# Altium PCB STM32F103RCT6最小系统.PcbDoc
Units mil, origin at the board's own origin, x right, y up, seen from the top; angles counter-clockwise.
Board outline 3346.46 x 2755.91 mil, 2 copper layers (Top Layer, Bottom Layer); 71 components, 79 nets, 324 pads, 173 vias.
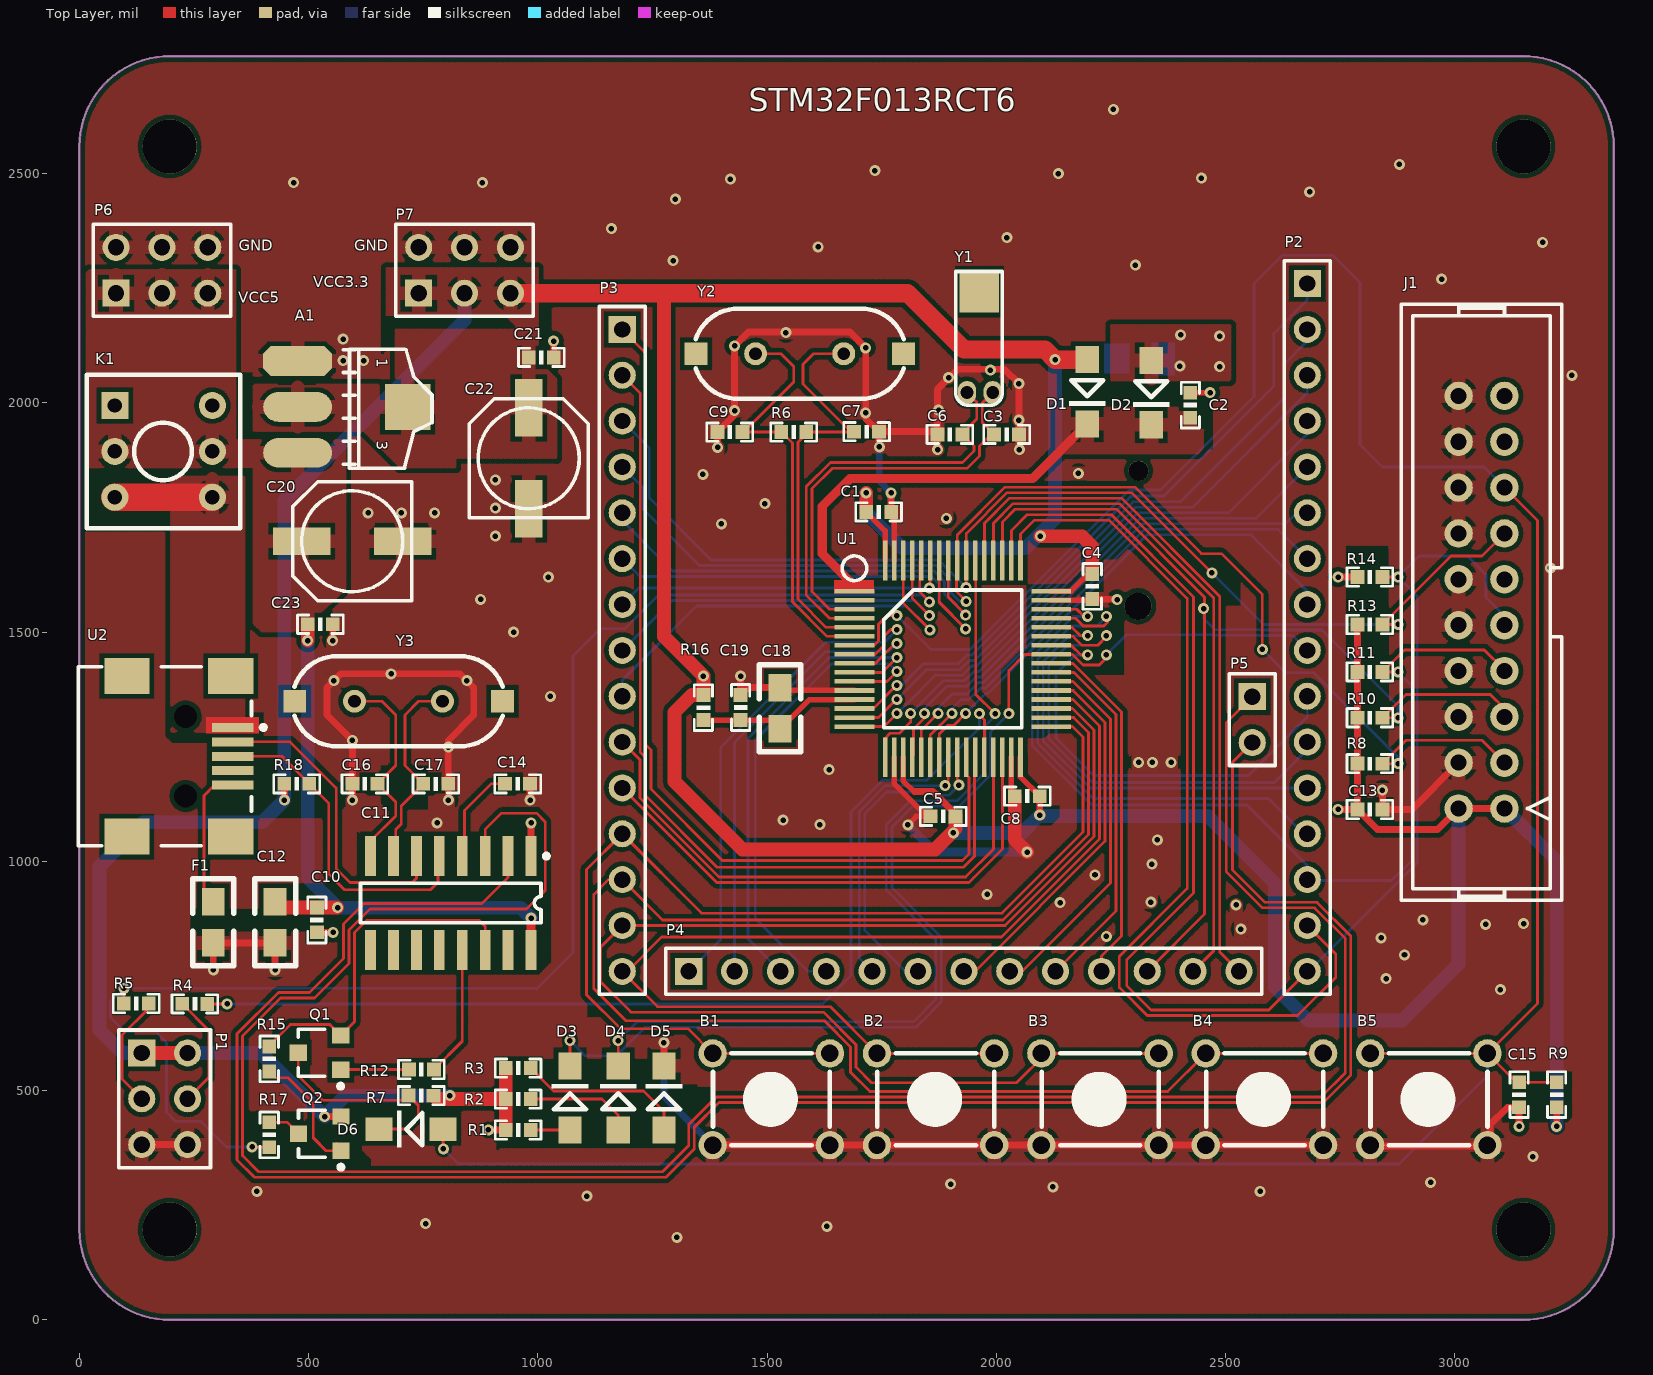
[diagram p0: Top Layer view]
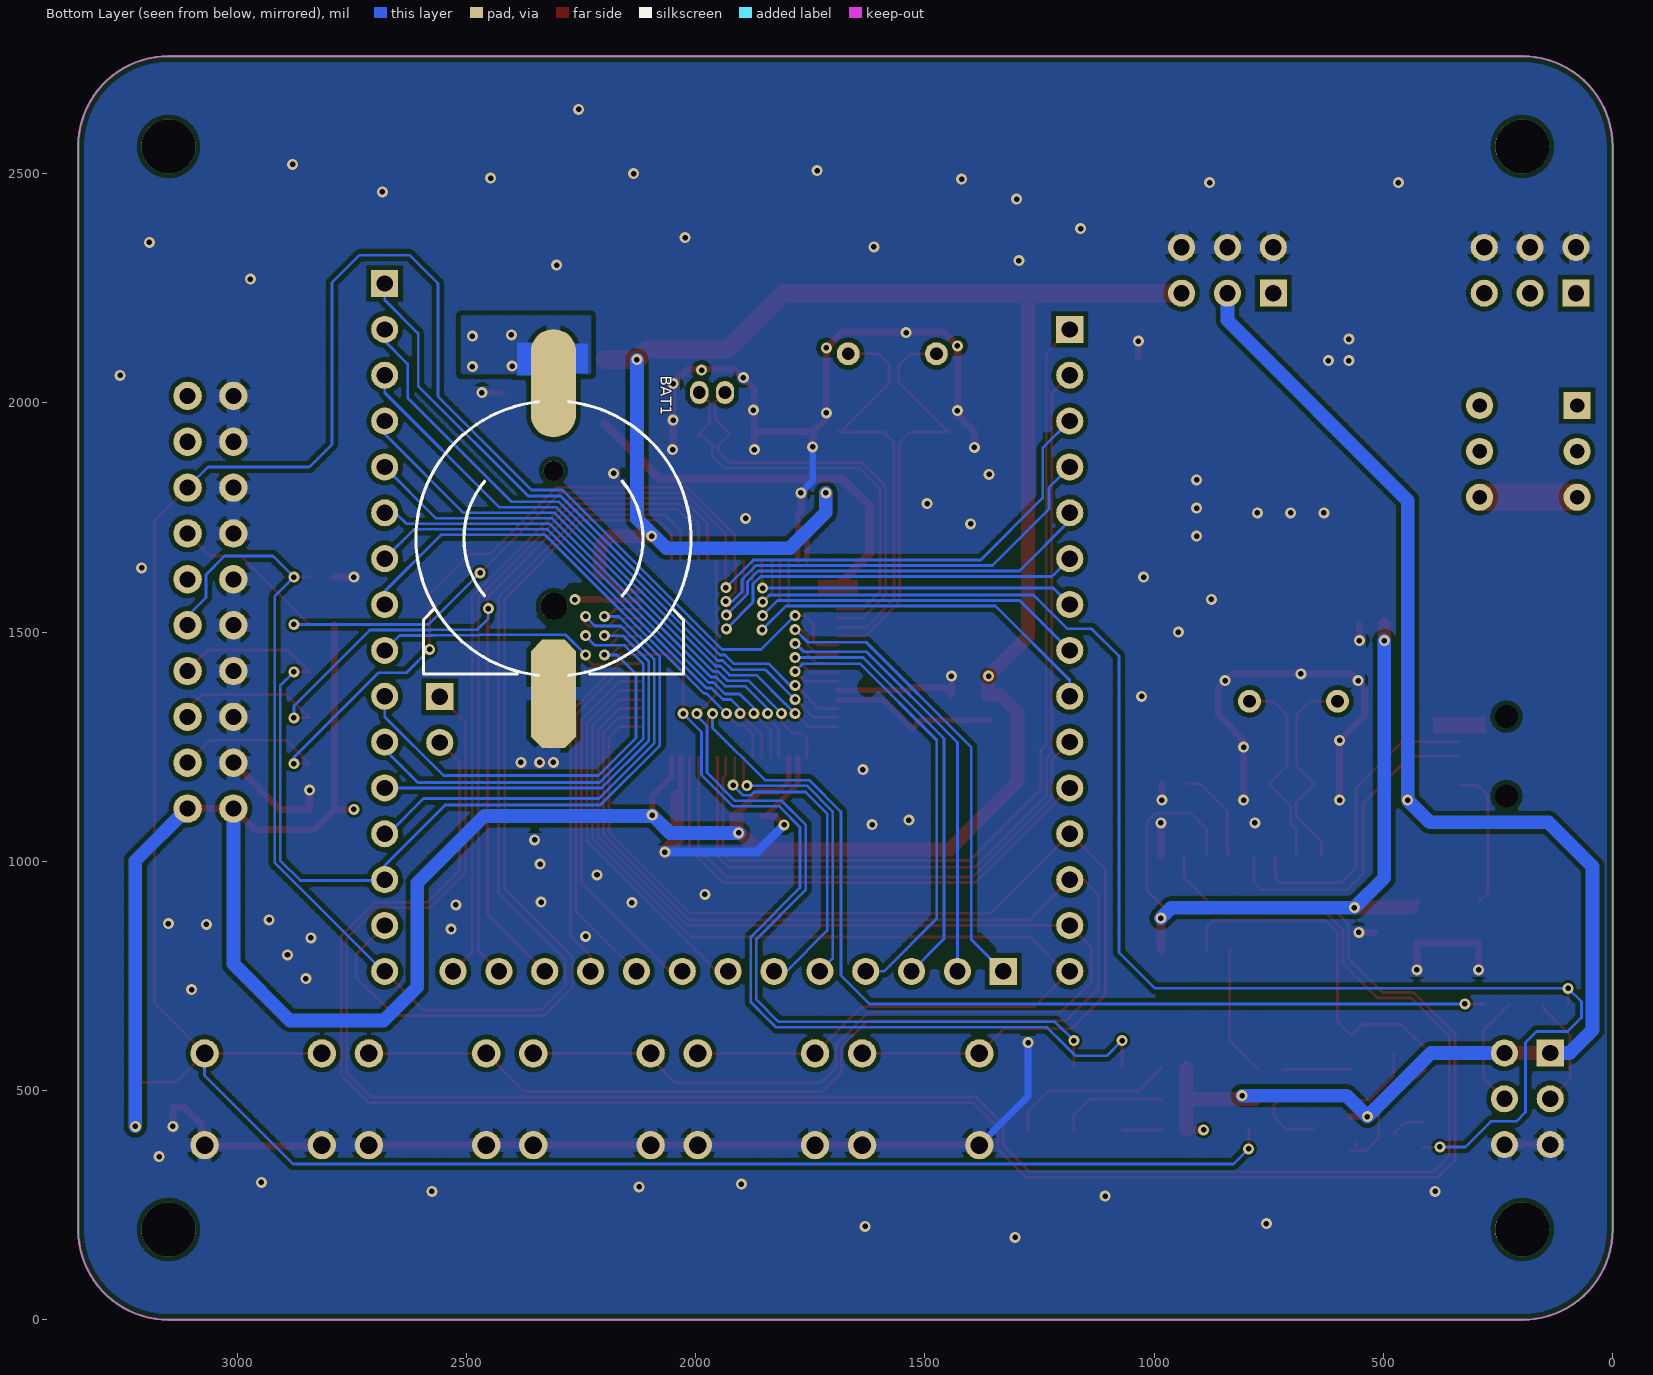
[diagram p1: Bottom Layer view, seen from below]

## Layer stack, top to bottom
Top Layer: signal copper 1.4
Dielectric: dielectric 12.6, FR-4, Dk 4.8
Bottom Layer: signal copper 1.4

## Board outline
196.85,0 cw(c196.85,196.85) 0,196.85 0,2559.06 cw(c196.85,2559.05) 196.85,2755.91 3149.61,2755.91 cw(c3149.61,2559.05) 3346.46,2559.06 3346.46,196.85 cw(c3149.61,196.85) 3149.61,0

## Design rules (kind name [scope] priority, off if disabled: settings)
Clearance via [isvia vs inpolygon] p1: gap=6
Clearance polygon [InPolygon] p2: gap=10
Clearance All [All] p3: gap=6
PolygonConnect [All] p1: connectstyle=Relief reliefconductorwidth=30 reliefentries=4 polygonreliefangle="90 Angle" airgapwidth=10
RoutingVias [All] p1: holewidth=12 width=24 viastyle="Through Hole" minholewidth=12 minwidth=24 maxholewidth=12 maxwidth=24
SilkToSilkClearance [All] p1: silktosilkclearance=2
SilkToSolderMaskClearance [IsPad] p1: minsilkscreentomaskgap=2 clearancetoexposedcopper=TRUE
SolderMaskExpansion [All] p1: expansion=2.5
Width PWR [InNetClass('PWR')] p1: maxlimit=60 minlimit=8 preferedwidth=15
Width [All] p2: maxlimit=6 minlimit=6 preferedwidth=6
26 further rules are at their usual default settings.

## Classes and differential pairs
net class PWR: GND NetK1_3 VBAT VCC3.3 VCC5

## Components (designator, comment, footprint, x,y, rotation, side; value= is the part's Value field where it differs from the comment)
A1 "ASM1117" AMS1117 476.06,2091.09 r270 top locked
B1 "Button" KEY_M 1636.91,381.06 r180 top locked
B2 "Button" KEY_M 1995.41,381.06 r180 top locked
B3 "Button" KEY_M 2353.91,381.06 r180 top locked
B4 "Button" KEY_M 2712.41,381.06 r180 top locked
B5 "Button" KEY_M 3070.91,381.06 r180 top locked
BAT1 "BATT" BATM 2310,1704.06 r180 bottom locked
C1 "104" 0603P 1743,1762.06 r0 top locked
C2 "104" 0603P 2423,1995.06 r270 top locked
C3 "22pF" 0603P 2022.5,1930.99 r180 top locked
C4 "104" 0603P 2209.06,1599.5 r270 top locked
C5 "104" 0603P 1884,1098 r180 top locked
C6 "22pF" 0603P 1898.5,1931.12 r0 top locked
C7 "22pF" 0603P 1717,1937.05 r180 top locked
C8 "104" 0603P 2067.5,1141.99 r180 top locked
C9 "22pF" 0603P 1418.5,1936.12 r0 top locked
C10 "104" 0603P 518,872.06 r90 top locked
C11 "CH340G" SOP16M 810,909.06 r180 top locked
C12 "10uF" 0805 426.94,822.05 r90 top locked
C13 "104" 0603P 2814.5,1113.06 r0 top locked
C14 "104" 0603P 956,1168.99 r180 top locked
C15 "104" 0603P 3140,491.06 r270 top locked
C16 "22" 0603P 622.5,1169.06 r0 top locked
C17 "22" 0603P 777.5,1168.99 r180 top locked
C18 "10uF" 0805 1528.06,1379.06 r270 top locked
C19 "104" 0603P 1442.06,1335.56 r270 top locked
C20 "Cap2" CC6.56.5 595,1698.06 r0 top locked
C21 "104" 0603P 1007.5,2098.99 r180 top locked
C22 "Cap2" CC6.56.5 980,1879.06 r270 top locked
C23 "104" 0603P 525.5,1516.99 r180 top locked
D1 "1N4148" DIODE_SOP 2198,2094.06 r270 top locked
D2 "1N4148" DIODE_SOP 2338,2092.06 r270 top locked
D3 "DS1" DIODE_SOP 1070,414.06 r90 top locked
D4 "DS0" DIODE_SOP 1175,414.06 r90 top locked
D5 "PWR" DIODE_SOP 1275,414.06 r90 top locked
D6 "1N4148" DIODE_SOP 793,416.06 r180 top locked
F1 "500mA" 0805 291.94,822.05 r90 top locked
J1 "JLINK" JTAG_20 3058,1565.06 r90 top locked
K1 "BUTTON" BTN8.5*8.5 77.4,1994.06 r0 top locked
P1 "BOOT" HDR2X3 136,582.06 r270 top locked
P2 "PA" HDR1X16 2678,2260.06 r270 top locked
P3 "PB" HDR1X15 1184,2160.06 r270 top locked
P4 "PC" HDR1X13 1329,760.06 r0 top locked
P5 "Uart1" HDR1X2 2558,1359.06 r270 top locked
P6 "VCC5" HDR2X3 80,2239.06 r0 top locked
P7 "VCC3.3" HDR2X3 740,2239.06 r0 top locked
Q1 "2N3904" SOT-23R 528.74,582.65 r90 top locked
Q2 "2N3906" SOT-23R 529.26,406.06 r90 top locked
R1 "Res2" 0603P 957,414.06 r0 top locked
R2 "Res2" 0603P 957,481.56 r0 top locked
R3 "Res2" 0603P 957,549.06 r0 top locked
R4 "Res2" 0603P 252,689.05 r180 top locked
R5 "Res2" 0603P 124,690.06 r0 top locked
R6 "Res2" 0603P 1558,1936.12 r0 top locked
R7 "Res2" 0603P 745.5,488.99 r180 top locked
R8 "Res2" 0603P 2814.5,1213.07 r0 top locked
R9 "Res2" 0603P 3222,491.06 r270 top locked
R10 "Res2" 0603P 2814.5,1313.09 r0 top locked
R11 "Res2" 0603P 2814.5,1413.1 r0 top locked
R12 "Res2" 0603P 746,546.06 r0 top locked
R13 "Res2" 0603P 2814.5,1516.58 r0 top locked
R14 "Res2" 0603P 2814.5,1620.05 r0 top locked
R15 "Res2" 0603P 414.13,569.06 r270 top locked
R16 "Res2" 0603P 1361,1335.05 r90 top locked
R17 "Res2" 0603P 413.94,403.55 r90 top locked
R18 "Res2" 0603P 474,1169.06 r0 top locked
U1 "STM32F103RCT6" LQFP64 1690.28,1589.13 r0 top locked
U2 "USB" USB/SM0.8-6H5 25,1229.06 r180 top locked
Y1 "32.768k" XTAL32 1936,2022.49 r90 top locked
Y2 "8M" XTAL_US 1474.87,2107.05 r0 top locked
Y3 "12M" XTAL_US 792.13,1349.06 r180 top locked

## Footprints (in the part's own frame and the unit in brackets; to place one, negate y for a bottom-side part, rotate by r counter-clockwise, add the part's x,y. Pads: shape width x height; smd on the part's side, far side on the other; paste and mask are expansions set on the pad)
0603P [mil]
  rect 30x30 smd: 1(-27,0) 2(27.5,-0.06)
  silkscreen extent -50,-20 50,20
0805 [mil]
  rect 60x50 smd: 1(0,-0.06) 2(90,-0.06)
  silkscreen extent -50,-45 140,45
AMS1117 [mil]
  oct 65x150 smd: 1(0.03,-0.06)
  oval 65x150 smd: 2(100.03,-0.06) 3(200.03,-0.06)
  rect 100x100 smd: 4(100.03,239.94)
  silkscreen extent -26,100 234,293
BATM [mm]
  round 1.1 hole 1.1 unplated: 0(0,3.748)
  round 1.5 hole 1.5 unplated: 0(0.025,-3.752)
  oct 2.5x6 smd: 1(0,-8.602)
  oval 2.5x6 smd: 2(0,8.598)
  silkscreen extent -7.62,-7.58 7.62,7.57
BTN8.5*8.5 [mm]
  rect 1.5x1.5 hole 0.8: 1(0,0)
  round 1.5 hole 0.8: 2(0,-2.54) 3(0,-5.08) 4(5.4,-5.08) 5(5.4,-2.54) 6(5.4,0)
  silkscreen extent -1.55,-6.79 6.95,1.71
CC6.56.5 [mm]
  rect 3.2x1.5 smd: 1(-2.794,0) 2(2.8,0)
  silkscreen extent -3.3,-3.3 3.3,3.3
DIODE_SOP [mm]
  rect 1.5x1.3 smd: 1(0,0) 2(3.556,0)
  silkscreen extent 1.14,-1.02 2.56,1.02
HDR1X2 [mm] "Connector; Header; 2 Position"
  rect 1.5x1.5 hole 0.9: 1(0,0)
  round 1.5 hole 0.9: 2(2.54,0)
  silkscreen extent -1.27,-1.27 3.81,1.27
HDR1X13 [mm] "Connector; Header; 13 Position"
  rect 1.5x1.5 hole 0.9: 1(0,0)
  round 1.5 hole 0.9: 2(2.54,0) 3(5.08,0) 4(7.62,0) 5(10.16,0) 6(12.7,0) 7(15.24,0) 8(17.78,0) 9(20.32,0) 10(22.86,0) 11(25.4,0) 12(27.94,0) 13(30.48,0)
  silkscreen extent -1.27,-1.27 31.75,1.27
HDR1X15 [mm] "Connector; Header; 15 Position"
  rect 1.5x1.5 hole 0.9: 1(0,0)
  round 1.5 hole 0.9: 2(2.54,0) 3(5.08,0) 4(7.62,0) 5(10.16,0) 6(12.7,0) 7(15.24,0) 8(17.78,0) 9(20.32,0) 10(22.86,0) 11(25.4,0) 12(27.94,0) 13(30.48,0) 14(33.02,0) 15(35.56,0)
  silkscreen extent -1.27,-1.27 36.83,1.27
HDR1X16 [mm] "Connector; Header; 16 Position"
  rect 1.5x1.5 hole 0.9: 1(0,0)
  round 1.5 hole 0.9: 2(2.54,0) 3(5.08,0) 4(7.62,0) 5(10.16,0) 6(12.7,0) 7(15.24,0) 8(17.78,0) 9(20.32,0) 10(22.86,0) 11(25.4,0) 12(27.94,0) 13(30.48,0) 14(33.02,0) 15(35.56,0) 16(38.1,0)
  silkscreen extent -1.27,-1.27 39.37,1.27
HDR2X3 [mm] "Connector; Header; 3x2 Position"
  rect 1.5x1.5 hole 0.9: 1(0,0)
  round 1.5 hole 0.9: 2(0,2.54) 3(2.54,0) 4(2.54,2.54) 5(5.08,0) 6(5.08,2.54)
  silkscreen extent -1.27,-1.27 6.35,3.81
JTAG_20 [mil]
  round 62 hole 35: 1(-450,-50) 2(-450,50) 3(-350,-50) 4(-350,50) 5(-250,-50) 6(-250,50) 7(-150,-50) 8(-150,50) 9(-50,-50) 10(-50,50) 11(50,-50) 12(50,50) 13(150,-50) 14(150,50) 15(250,-50) 16(250,50) 17(350,-50) 18(350,50) 19(450,-50) 20(450,50)
  silkscreen extent -650,-175 650,175
KEY_M [mil]
  round 62 hole 38: 1(0,0) 1(255.91,0) 2(0,-200) 2(255.91,-200)
  silkscreen extent 0,-200 255,0
LQFP64 [mm]
  rect 2.2x0.254 smd: 1(0,0) 2(0,-0.5) 3(0,-1) 4(0,-1.5) 5(0,-2) 6(0,-2.5) 7(0,-3) 8(0,-3.5) 9(0,-4) 10(0,-4.5) 11(0,-5) 12(0,-5.5) 13(0,-6) 14(0,-6.5) 15(0,-7) 16(0,-7.5) 33(10.9,-7.5) 34(10.9,-7) 35(10.9,-6.5) 36(10.9,-6) 37(10.9,-5.5) 38(10.9,-5) 39(10.9,-4.5) 40(10.9,-4) 41(10.9,-3.5) 42(10.9,-3) 43(10.9,-2.5) 44(10.9,-2) 45(10.9,-1.5) 46(10.9,-1) 47(10.9,-0.5) 48(10.9,0)
  rect 0.254x2.2 smd: 17(1.7,-9.2) 18(2.2,-9.2) 19(2.7,-9.2) 20(3.2,-9.2) 21(3.7,-9.2) 22(4.2,-9.2) 23(4.7,-9.2) 24(5.2,-9.2) 25(5.7,-9.2) 26(6.2,-9.2) 27(6.7,-9.2) 28(7.2,-9.2) 29(7.7,-9.2) 30(8.2,-9.2) 31(8.7,-9.2) 32(9.2,-9.2) 49(9.2,1.7) 50(8.7,1.7) 51(8.2,1.7) 52(7.7,1.7) 53(7.2,1.7) 54(6.7,1.7) 55(6.2,1.7) 56(5.7,1.7) 57(5.2,1.7) 58(4.7,1.7) 59(4.2,1.7) 60(3.7,1.7) 61(3.2,1.7) 62(2.7,1.7) 63(2.2,1.7) 64(1.7,1.7)
  silkscreen extent -0.68,-7.56 9.26,1.95
SOP16M [mm]
  rect 0.6x2.2 smd: 1(-4.445,-2.6) 2(-3.175,-2.6) 3(-1.905,-2.6) 4(-0.635,-2.6) 5(0.635,-2.6) 6(1.905,-2.6) 7(3.175,-2.6) 8(4.445,-2.6) 9(4.445,2.6) 10(3.175,2.6) 11(1.905,2.6) 12(0.635,2.6) 13(-0.635,2.6) 14(-1.905,2.6) 15(-3.175,2.6) 16(-4.445,2.6)
  silkscreen extent -5.42,-2.72 5,1.1
SOT-23R [mm]
  rect 0.9x0.95 smd: 1(0.95,-1.048) 2(-0.95,-1.048) 3(0,1.302)
  silkscreen extent -1.98,-1.17 1.3,1.3
USB/SM0.8-6H5 [mm]
  rect 2.3x0.5 smd: 1(-7.85,-1.6) 2(-7.85,-0.8) 3(-7.85,0) 4(-7.85,0.8) 5(-7.85,1.6)
  rect 2.5x2 smd: 6(-7.75,4.45) 7(-1.996,4.45) 8(-7.75,-4.45) 9(-1.996,-4.45)
  round 0.6 hole 1.27 unplated: MH1(-5.25,2.2) MH2(-5.25,-2.2)
  silkscreen extent -9.68,-4.95 0.7,4.95
XTAL32 [mil]
  oval 50x40 hole 28: 1(0,0) 2(0,-56)
  rect 92.13x86 smd: ""(220,-27)
  silkscreen extent -28,-77 264,25
XTAL_US [mil]
  round 50 hole 28: 1(0,0) 2(192.13,0)
  rect 50x50 smd: ""(-130.32,0) ""(322.44,0)
  silkscreen extent -131,-98 323,98

## Part data
A1: library part AMS117
BAT1: library part BAT
C1 C2 C3 C4 C5 C6 C7 C8 C9 C10 C12 C13 C14 C15 C16 C17 C18 C19 C21 C23: library part Cap, "Capacitor"
C20 C22: "Capacitor"
D1 D2 D6: library part LED
D3 D4 D5: library part LED3, "Typical BLUE SiC LED"
F1: library part Res2, "Resistor"
J1: library part JLINK2X10
P1 P6 P7: library part "Header 3X2", "Header, 3-Pin, Dual row"
P2: library part "Header 16", "Header, 16-Pin"
P3: library part "Header 15", "Header, 15-Pin"
P4: library part "Header 13", "Header, 13-Pin"
P5: library part "Header 2", "Header, 2-Pin"
Q1: "NPN General Purpose Amplifier"
Q2: "PNP General Purpose Amplifier"
R1 R2 R3 R4 R5 R6 R7 R8 R9 R10 R11 R12 R13 R14 R15 R16 R17 R18: "Resistor"
U1: library part STM32F103RCT6_64Pin
Y1 Y2 Y3: library part XTAL, "Crystal Oscillator"

## Free pads (board coordinates)
  round 118.11 hole 118.11 unplated: 1(196.85,196.85) 1(196.85,2559.06) 1(3149.61,196.85) 1(3149.61,2559.06)

## Via types
v1: diameter 24, hole 12, Top Layer to Bottom Layer, tented both sides, 173 vias

## Nets (pads, with @x,y where several pads share a name; then routed paths per layer and width w, separated by ;. In a path a pad name is that pad's centre, name@x,y a point inside that pad or via, vN(x,y) a via of type N, cw(c..) or ccw(c..) an arc to the next point about the centre after c; other vN are vias at no path point)
BOOT0: R5.1 R17.1 U1.60 | length 3258
  Top Layer w6: R5.1 v1(97,723) ; v1(377,377.06) 377.5,376.56 R17.1 ; U1.60 1833,1653.11 1833,1587.3 1854,1566.3 v1(1854,1566)
  Bottom Layer w6: v1(377,377.06) 320.94,377.06 265,433 210,433 190,453 190,605 166,629 98,629 68,659 68,694 v1(97,723) 998,723 1076.5,801.5 1076.5,1447.5 1136,1507 1189,1507 1263,1581 1815.94,1581 1816,1581.06 1838.94,1581.06 v1(1854,1566)
BOOT1: R4.1 U1.28 | length 2273
  Top Layer w6: R4.1 321.94,689.06 v1(322,689) ; v1(1963,1322) 1963,1319 1973.74,1308.26 U1.28
  Bottom Layer w6: v1(322,689) 1621,689 1683,751 1683,1107.94 1752.06,1177 1849,1177 1963,1291 v1(1963,1322)
CH340_D+: C11.5 R18.2 U2.3 | length 724.3
  Top Layer w6: U2.3 441.43,1229.06 R18.2 544,1126.49 544,972 578,938 765.94,938 782,954.06 782,1008.42 C11.5
CH340_D-: C11.6 U2.2 | length 683.2
  Top Layer w6: U2.2 459.5,1260.55 560,1160.06 560,984 590,954 726,954 735,963 C11.6
GND: A1.1 B1.1 B2.1 B3.1 B4.1 B5.1 BAT1.1 C1.2 C2.1 C3.1 C4.2 C5.2 C6.1 C7.1 C8.2 C9.1 C10.1 C11.1 C12.1 C13.2 C14.1 C15.2 C16.1 C17.1 C18.1 C19.1 C20.2 C21.1 C22.2 C23.1 D5.2 F1.1 J1.4 J1.6 J1.8 J1.10 J1.12 J1.14 J1.16 J1.18 J1.20 P1.5 P1.6 P6.2 P6.4 P6.6 P7.2 P7.4 P7.6 R14.1 U1.12 U1.18 U1.31 U1.47 U1.63 | length 6681.3
  Top Layer w12: C18.1 1534.46,1372.59 U1.12 ; C1.2 1776.89,1755.6 U1.63 ; U1.18 1776.89,1169.76 C5.2@1848.59,1098.06 ; v1(1807,1079.69) 1825.37,1098.06 C5.2@1848.59,1098.06 ; C5.2 C5.2@1848.59,1098.06 ; U1.31 2032.8,1149.26 C8.2 ; U1.47 C4.2@2197.82,1569.44 ; C2.1 v1(2466,2022.06)
  Top Layer w15: P1.5 P1.6 ; v1(292,763.06) F1.1 C12.1 v1(427,763.06) ; C10.1 v1(553.56,845.06) ; v1(552.5,1481.43) C23.1 ; v1(595.5,1133.56) v1(595.5,1263.56) 540,1319.06 540,1379.06 570,1409.06 830,1409.06 860,1379.06 860,1319.06 804.5,1263.56 C17.1 v1(804.5,1133.43) ; v1(983,1133.43) C14.1 ; C11.1 v1(985,1084.06) ; C21.1 v1(1034.5,2134.56) ; D5.2 v1(1275,604.56) ; B1.1@1381,381.06 1636.91,381.06 B4.1@2727.48,381.06 ; v1(1392,1903) 1391.5,1903.5 C9.1 1429,1973.62 v1(1429,2124.06) 1459,2154.06 1681,2154.06 v1(1715,2120.06) 1715,1966.06 C7.1 ; v1(1442.06,1403.99) C19.1 1458.56,1379.06 C18.1 ; v1(1744.5,1903.94) 1744,1904.44 C7.1 ; C1.2 v1(1770.5,1803.43) ; v1@1871.5,1898.5 C6.1 ; v1(2050,1897.87) 2049.5,1898.37 C3.1 2049,1931.49 v1(2049,2042.06) 2018,2073.06 1915,2073.06 1871.5,2029.56 C6.1 ; C4.2@2209.5,1571.5 v1@2263,1571.5 ; v1(2745,1620.05) R14.1 ; B5.1@2815,379.06 3070.91,379.06 3076.95,385.1 3076.95,426.01 3114.5,463.56 C15.2 v1(3139.94,422.12) ; v1(2842,1155.49) C13.2 2905.94,1112.99 J1.4 ; C7.1 1865.56,1937.06 C6.1
  Top Layer w30: C8.2 2040,1047 v1(2067,1020)
  Bottom Layer w15: v1(1275,604.56) 1275,487.06 B1.1@1381,381.06 ; v1(1744.5,1903.94) 1744.5,1829.43 v1(1770.5,1803.43)
  Bottom Layer w20: v1(1807,1079.69) 1866.69,1020 v1(2067,1020)
  other v1: 1303,180 1630,204.06 755,210 1107,270 387,280 2575,280 2123,290 1900,296.06 2947,300 3170,356.06 3099,720 2850,744.06 2890,796.06 2839,833.2 2240,836.06 2533,852 3067,862.45 3150,864.06 2930,872.06 2523,905 2139,910 2337,911 1980,928.06 2215,970.5 2339,994 2351,1047 1615,1080 780,1084.06 1535,1090 1635,1200 2310,1216.06 2340,1216.06 2380.92,1216.06 804.5,1249.06 1027,1360 555,1394.06 845,1394.06 680,1409.06 947,1500 875,1571.14 2263,1571 1023,1620 3208,1640.06 907,1709.06 1400,1736.06 1891,1748.06 630,1760.06 702.5,1760.06 775,1760.06 907,1770.56 1495,1780 907,1832.06 1360,1844.06 2179,1846 1872,1898 2049,1962.06 1715,1978.06 1429,1983.06 1874,1984.06 1896,2055.06 3255,2060 1987,2071.06 575,2092.06 620,2092.06 575,2139.06 1541,2153.06 2971,2270 2303,2300 1295,2310 1611,2340 3191,2350 2023,2360 1160,2380.06 1300,2444.06 2683,2460 467,2480 879,2480 1420,2488.06 2447,2490 2135,2500 1735,2506.23 2879,2520 2255,2640
JTCK: J1.9 P2.16 R14.2 U1.50 | length 3277.2
  Top Layer w6: U1.50 2032.8,1721.63 2067.16,1756 2250.5,1756 2430,1576.5 2430,931 2284,785 2284,729 2337,676 2593.94,676 P2.16 ; R14.2 v1(2875.94,1619.99)
  Bottom Layer w6: P2.16 2681.06,760.06 2918,997 2918,1577.93 v1(2875.94,1619.99) 2921.94,1666 3027,1666 3068,1625 3068,1575.06 3108,1535.06 J1.9
JTDI: J1.5 P4.11 R10.2 U1.51 | length 2385.7
  Top Layer w6: U1.51 2013.11,1740 2041.11,1768 2262,1768 2454,1576 2454,885.06 P4.11 ; v1(2875.94,1313.02) R10.2 2893.03,1364.06 3077,1364.06 3108,1333.06 J1.5
  Bottom Layer w6: v1(2452,1551) 2452,1530 2477,1505 2577.03,1505 2577.51,1504.51 2710.49,1504.51 2875.94,1339.06 v1(2875.94,1313.02)
JTDO: J1.13 P3.3 R13.2 U1.55 | length 2562
  Top Layer w6: v1(1934,1597) 1934.37,1597.37 U1.55 1934.37,1714.89 2023.48,1804 2295,1804 v1(2470,1629) ; v1(2875.94,1516.51) R13.2 2991.54,1666.06 3059,1666.06 J1.13
  Bottom Layer w6: P3.3 1243,1901.06 1243,1792 1378,1657 1874,1657 v1(1934,1597) ; v1(2470,1629) 2582.49,1516.51 v1(2875.94,1516.51)
JTMS: J1.7 P2.14 R11.2 U1.46 | length 2185.3
  Top Layer w6: U1.46 2175.24,1549.76 2191,1534 v1@2198,1534 ; v1(2875.94,1413.04) R11.2 2890.02,1461.06 3064,1461.06 3108,1417.06 J1.7
  Bottom Layer w6: v1(2199,1534) 2166.73,1534 2078,1445.27 2078,1252.96 2207.96,1123 2546,1123 2678,991 P2.14 2680.06,958 2862,958 2906,1002 2906,1382.97 v1(2875.94,1413.04)
JTRST: J1.3 P3.4 R8.2 U1.56 | length 2743.1
  Top Layer w6: v1(1934,1567) 1934,1567.3 1913,1588.3 1913,1654.37 U1.56 1914.68,1712.17 2018.51,1816 2302,1816 2447,1671 2491,1671 2580,1582 v1(2580,1462) ; v1(2875.94,1213.01) R8.2 2893.05,1264.06 3059,1264.06 J1.3
  Bottom Layer w6: P3.4 1229,1815.06 1229,1768 1352,1645 1868.64,1645 1899,1614.64 1899,1587.97 1919.97,1567 v1(1934,1567) ; v1(2580,1462) 2631,1411 2692,1411 2875.94,1227.06 v1(2875.94,1213.01)
KEY0: B1.2 P3.12 U1.33 | length 2403.4
  Top Layer w6: B1.2@1636.91,581.06 1381,581.06 1327.06,635 1180,635 1106,709 1106,982.06 P3.12 1357.06,887 2012.12,887 2189,1063.88 2189,1271 2166.15,1293.85 U1.33
KEY1: B4.2 P3.13 U1.34 | length 3499
  Top Layer w6: U1.34 2168.49,1313.54 2201,1281.03 2201,1058.91 2014.14,872.06 1272,872.06 P3.13 1154.06,960.06 1122,928 1122,722.06 1191.54,652.51 1624.51,652.51 1682,595.03 1682,540 1724,498 2373.44,498 B4.2@2456.5,581.06 ; B4.2@2471.57,581.06 2712.41,581.06 B4.2@2727.48,581.06
  Bottom Layer w6: P3.13 P3.13@1203.94,960.06
KEY2: B3.2 P3.14 U1.35 | length 2970.4
  Top Layer w6: U1.35 2165.78,1333.22 2213,1286 2213,1053.94 2019.11,860.06 P3.14 1137,813.06 1137,737 1203,671 1623,671 1694,600 1694,551 1728,517 2043.99,517 2108.05,581.06 2353.91,581.06 B3.2@2363.95,581.06
KEY3: B2.2 P3.15 U1.36 | length 2421.8
  Top Layer w6: B2.2@1739.5,581.06 1637.56,683 1261.06,683 P3.15 1195.06,760.06 1270,835 2011.03,835 2225,1048.97 2225,1295 2167.09,1352.91 U1.36 ; B2.2@1744.52,581.06 1995.41,581.06 B2.2@2000.43,581.06
LED0: D3.2 P2.9 U1.41 | length 2575.9
  Top Layer w6: D3.2 v1(1070,609.06) ; v1(2027,1322) 2027,1416.5 2061.83,1451.33 U1.41 2165.92,1451.33 2188.97,1428.28 2224.28,1428.28 v1@2241,1445
  Bottom Layer w6: v1(1070,609.06) 1103,576.06 1171.7,576.06 1196,600.36 1196,600.5 1233.5,638 1823.97,638 1835.97,650 1836.94,650 1879.53,692.58 1879.53,834.97 1772,942.5 1772,1074.39 1816.97,1119.36 1816.97,1120 1918.67,1120 1987,1188.33 1987,1282 v1(2027,1322) ; v1(2240,1450) 2240,1450.85 2283.15,1494 2471.03,1494 2472.03,1493 2572.06,1493 2572.54,1492.51 2645.54,1492.51 P2.9
LED1: D4.2 U1.54 | length 1962.2
  Top Layer w6: D4.2 v1(1175,609.06) ; U1.54 1955,1655.11 1955,1364 v1(1997,1322)
  Bottom Layer w6: v1(1175,609.06) 1215.94,650 1819,650 1867.53,698.53 1867.53,830 1760,937.53 1760,1080 1812,1132 1913.7,1132 1975,1193.3 1975,1295 1997,1317 v1(1997,1322)
NetBAT1_2: BAT1.2 D2.1
  other v1: 2487,2079.06 2400,2080.06 2487,2145.67 2401.57,2148.06
NetC11_4: C11.4 C14.2 | length 214.2
  Top Layer w6: C11.4 840,1016.42 840,1111.06 898,1169.06 C14.2
NetC11_7: C11.7 C17.2 Y3.1 | length 445.7
  Top Layer w6: C11.7 690,1016.42 690,1069.06 702,1081.06 702,1121.06 C17.2 710,1209.06 710,1319.06 740,1349.06 Y3.1
NetC11_8: C11.8 C16.2 Y3.2 | length 466
  Top Layer w6: Y3.2 660,1349.06 690,1319.06 690,1209.06 650,1169.06 690,1129.06 690,1099.06 635,1044.06 C11.8
NetC11_13: C11.13 R12.2 | length 286.2
  Top Layer w6: R12.2 835,607.49 C11.13
NetC11_14: C11.14 Q1.1 R15.1 | length 777.7
  Top Layer w6: R15.1@412,596.06 460,644.06 546,644.06 Q1.1 600,650.06 600,845.03 625.97,871 872,871 885,858 C11.14
NetC18_2: C18.2 C19.2 R16.1 U1.13 | length 363.6
  Top Layer w12: R16.1 C19.2 1509,1308.06 C18.2 1591.85,1352.91 U1.13
NetD3_1: D3.1 R1.2 | length 85.5
  Top Layer w6: R1.2 1069.94,413.99 D3.1
NetD4_1: D4.1 R2.2 | length 237.4
  Top Layer w6: R2.2 1140,481.49 1175,446.49 D4.1
NetD5_1: D5.1 R3.2 | length 369.8
  Top Layer w6: R3.2 1034.44,499.06 1230,499.06 1275,454.06 D5.1
NetD6_2: D6.2 Q1.3 R7.2 | length 469.4
  Top Layer w6: Q1.3 477.48,531.47 529.83,479.12 708.06,479.12 R7.2 739,468.06 739,443.06 712,416.06 D6.2
NetF1_2: F1.2 U2.5 | length 310.9
  Top Layer w6: F1.2 271.91,932.15 271.91,1142.96 295.01,1166.07 U2.5
NetK1_3: K1.3 K1.4 U2.1 | length 212.6
  Top Layer w60: K1.3 K1.4
NetP1_3: P1.3 R5.2 | length 250
  Top Layer w6: P1.3 93,525.06 93,621.06 151.5,679.56 R5.2
NetP1_4: P1.4 R4.2 | length 249.9
  Top Layer w6: R4.2 282,631.62 282,528.06 P1.4
NetQ1_2: Q1.2 R12.1 | length 149.3
  Top Layer w6: Q1.2 570.8,546.06 R12.1
NetQ2_2: Q2.2 R15.2 | length 286.8
  Top Layer w6: R15.2@408.24,545.25 R15.2@411.94,541.56 ; R15.2 427.56,528.06 455,528.06 510,473.06 510,435.76 510,397.06 538.4,368.65 Q2.2 ; Q2.2@560.9,376.15 Q2.2@560.9,385.15
NetQ2_3: Q2.3 R17.2 | length 74.4
  Top Layer w6: R17.2 453,431.06 Q2.3
OSC32_1: C3.2 U1.3 Y1.2 | length 903.6
  Top Layer w6: U1.3 1636.3,1549.76 1598,1588.06 1598,1813.03 1641.97,1857 1935.94,1857 1963,1884.06 1963,1906.06 1988,1931.06 C3.2 1969,1957.05 1969,1999.5 Y1.2
OSC32_2: C6.2 U1.4 Y1.1 | length 920
  Top Layer w6: U1.4 1635.98,1530.07 1585,1581.06 1585,1817 1638,1870 1925.94,1870 1951,1895.06 1951,1906.06 C6.2 1926,1933.06 1957,1964.06 1957,2001.49 Y1.1
OSCIN: C7.2 R6.2 U1.5 Y2.2 | length 920.6
  Top Layer w6: Y2.2 1601,2107.06 1578,2084.06 1578,2041.06 1681.94,1937.12 C7.2 ; C7.2@1689.5,1936.06 R6.2 1585.5,1932.56 1567,1914.06 1567,1572.06 1628.67,1510.39 U1.5
OSCOUT: C9.2 R6.1 U1.6 Y2.1 | length 914.3
  Top Layer w6: C9.2 C9.2@1449,1936.06 ; Y2.1 1530,2107.06 1558,2079.06 1558,2045.06 C9.2@1449,1936.06 ; R6.1@1530.94,1936.06 C9.2@1449,1936.06 ; R6.1 1555,1912.12 1555,1566.06 1630.35,1490.7 U1.6
PA0: P2.1 U1.14 | length 1458.8
  Top Layer w6: U1.14 1731.62,1333.22 v1@1781.55,1383.14 ; v1@1781,1383.14 v1@1781,1384
  Bottom Layer w6: v1(1783,1383.5) 1793.5,1383.5 1841,1431 1917,1431 1936,1450 1946.97,1450 2293.97,1797 2365,1797 2605,2037 2605,2151 2678,2224 P2.1
PA1: P2.2 U1.15 | length 1396.2
  Top Layer w6: U1.15 1742.54,1313.54 1781.57,1352.57 v1@1783,1352.57
  Bottom Layer w6: v1(1783,1353) 1848,1418 1920.97,1418 1940.97,1438 1951.94,1438 2297.94,1784 2401,1784 2628,2011 2628,2085 2678,2135 P2.2
PA2: P2.3 U1.16 | length 1327.2
  Top Layer w6: U1.16 1754.85,1293.85 v1@1783,1322
  Bottom Layer w6: v1(1783,1322.5) 1804,1343.5 1804.5,1343.5 1867,1406 1925.94,1406 1945.94,1426 1956.91,1426 2302.91,1772 2428,1772 2678,2022 P2.3
PA3: P2.4 U1.17 | length 1276.3
  Top Layer w6: U1.17 1757.2,1268.27 1768.16,1279.23 1788.23,1279.23 1813,1304 v1(1813,1322.5) v1@1813,1322.8
  Bottom Layer w6: v1(1813,1322.5) 1884.5,1394 1930.91,1394 1950.91,1414 1961.88,1414 2307.88,1760 2506,1760 2678,1932 P2.4
PA4: P2.5 U1.20 | length 1182.6
  Top Layer w6: U1.20 1819,1229.66 1819,1289 1843,1313 v1(1843,1322.5) ; v1@1842.25,1323.25 v1@1843,1324
  Bottom Layer w6: v1(1843,1322.5) 1843,1333 1892,1382 1935.88,1382 1955.88,1402 1966.85,1402 2312.85,1748 2565.94,1748 P2.5 P2.5@2666.94,1860.06
PA5: P2.6 U1.21 | length 1117.1
  Top Layer w6: U1.21 1835.95,1285.45 1864,1313.5 ; v1(1873,1322.5) 1864,1313.5 ; v1@1873,1323 1864,1314 1864,1313.5
  Bottom Layer w6: v1(1873,1322.5) 1873,1334 1903.65,1364.65 1935.5,1364.65 1960.85,1390 1971.82,1390 2317.82,1736 2630,1736 2654.06,1760.06 P2.6
PA6: P2.7 U1.22 | length 1089.1
  Top Layer w6: U1.22 1855.63,1275.13 v1(1903,1322.5)
  Bottom Layer w6: v1(1903,1322.5) 1903,1333 1922.65,1352.65 1940.47,1352.65 1965.82,1378 1976.79,1378 2322.79,1724 2614.06,1724 P2.7
PA7: P2.8 U1.23 | length 1113.3
  Top Layer w6: U1.23 1875.32,1277.84 1894.24,1296.76 1907.26,1296.76 v1(1933,1322.5)
  Bottom Layer w6: v1(1933,1322.5) 1976.5,1366 1981.76,1366 2327.76,1712 2555,1712 2678,1589 P2.8
PA9: P2.10 U1.42 | length 994.3
  Top Layer w6: U1.42 2163.2,1471.02 2184.22,1450 v1(2199,1450)
  Bottom Layer w6: v1(2199,1450) 2171.28,1450 2130,1408.72 2130,1268.84 2211.92,1186.92 2549.92,1186.92 2678,1315 P2.10
PA10: P2.11 U1.43 | length 1101.2
  Top Layer w6: U1.43 2167.3,1490.7 2187,1471 2221,1471 2240,1490 v1@2240,1491
  Bottom Layer w6: v1(2240,1492) 2219,1471 2154.65,1471 2114,1430.35 2114,1267.87 2209.81,1172.06 2606,1172.06 2678,1244.06 P2.11
PA11: P2.12 U1.44 | length 997.7
  Top Layer w6: U1.44 2165.17,1510.39 2183.56,1492 v1@2198,1492
  Bottom Layer w6: v1(2199,1492) 2158.68,1492 2102,1435.32 2102,1262.9 2204.84,1160.06 P2.12
PA12: P2.13 U1.45 | length 1186.1
  Top Layer w6: U1.45 2172.23,1530.07 2189.3,1513 2234,1513 2242,1521 v1@2242,1533
  Bottom Layer w6: v1(2240,1534) 2219,1513 2162.7,1513 2090,1440.29 2090,1257.93 2210.93,1137 2593,1137 2669.94,1060.06 P2.13
PA14: P2.15 U1.49 | length 2084.4
  Top Layer w6: U1.49 2052.48,1713.48 2083,1744 2245.53,1744 2416,1573.53 2416,941 2268,793 2268,725 2329,664 2657,664 2740,747 2740,798.06 P2.15
PB0: P3.1 U1.26 | length 2005.4
  Top Layer w6: P3.1 1235,2109.06 1235,1254.52 1246.53,1243 1246.53,1157.47 1402,1002 1925.97,1002 1940.05,1016.08 1940.05,1183 1934.37,1188.68 U1.26
PB1: P3.2 U1.27 | length 1946.5
  Top Layer w6: P3.2 1223,2021.06 1223,1238.03 1234.53,1226.5 1234.53,1143.47 1391,987 1927.94,987 1952.05,1011.11 1952.05,1224.92 U1.27
PB5: P3.5 U1.57 | length 1001.8
  Top Layer w6: U1.57 1895,1576.3 1933,1538.3 v1(1933,1537)
  Bottom Layer w6: P3.5 1184,1743 1294,1633 1863.67,1633 1887,1609.67 1887,1583 v1(1933,1537)
PB6: P3.6 U1.58 | length 1008.6
  Top Layer w6: U1.58 1875.32,1564.99 1933,1507.3 v1(1933,1507)
  Bottom Layer w6: P3.6 1223.06,1621 1858,1621 1862,1617 1862.7,1617 1875,1604.7 1875,1565 v1(1933,1507)
PB7: P3.7 U1.59 | length 745.6
  Top Layer w6: v1(1854,1596) 1855.63,1597.63 U1.59
  Bottom Layer w6: P3.7 1219.94,1596 v1(1854,1596)
PB8: P3.8 U1.61 | length 864.5
  Top Layer w6: U1.61 1816.26,1574.04 1854,1536.3 v1(1854,1536)
  Bottom Layer w6: P3.8 1292.94,1569 1821,1569 v1(1854,1536)
PB9: P3.9 U1.62 | length 969.8
  Top Layer w6: U1.62 1796.57,1563.42 v1(1855,1505)
  Bottom Layer w6: P3.9 1184,1395 1346,1557 1803,1557 v1(1855,1505)
PB10: P3.10 U1.29 | length 1205.4
  Top Layer w6: P3.10 1222.53,1221.53 1222.53,1138.5 1395.03,966 1933,966 1993.43,1026.42 U1.29
PB11: P3.11 U1.30 | length 1144.6
  Top Layer w6: P3.11 1390.06,954 1940,954 1949.92,963.92 1950,963.92 1964.05,977.97 1964.05,978.05 2013.11,1027.11 U1.30
PC0: P4.1 U1.8 | length 1135.1
  Top Layer w6: U1.8 1735.33,1451.33 1754.58,1470.58 1754.58,1490.58 1769.5,1505.5 v1(1783,1505.5)
  Bottom Layer w6: P4.1 1399,830.06 1399,1249 1627.86,1477.86 1755.36,1477.86 v1(1783,1505.5)
PC1: P4.2 U1.9 | length 1048.9
  Top Layer w6: U1.9 1735.65,1431.65 v1@1778.86,1474.86
  Bottom Layer w6: P4.2 1429,1259 1627,1457 1765,1457 v1(1783,1475)
PC2: P4.3 U1.10 | length 1041.7
  Top Layer w6: U1.10 1750.46,1411.96 v1(1783,1444.5)
  Bottom Layer w6: P4.3 1458,831.06 1458,1268 1634.5,1444.5 v1(1783,1444.5)
PC3: P4.4 U1.11 | length 1078.5
  Top Layer w6: U1.11 1761.28,1392.28 v1(1783,1414)
  Bottom Layer w6: P4.4 1588.94,760.06 1474,875 1474,1264 1641,1431 1766,1431 v1(1783,1414)
PC4: P4.5 U1.24 | length 658.6
  Top Layer w6: P4.5 P4.5@1752.06,760.06 ; v1(1888,1165) 1895,1172 U1.24
  Bottom Layer w6: P4.5 1701,788.06 1701,1108.97 1757.03,1165 v1(1888,1165)
PC5: P4.6 U1.25 | length 720.8
  Top Layer w6: P4.6 P4.6@1842.77,760.06 ; U1.25 1914.69,1169.31 v1(1918,1166)
  Bottom Layer w6: P4.6 1801.94,760.06 1713,849 1713,1104 1759.95,1150.95 1872.35,1150.95 1879.3,1144 1896.7,1144 1918,1165.3 v1(1918,1166)
PC6: P4.7 U1.37 | length 831
  Top Layer w6: P4.7 1953.06,760.06 2237,1044 2237,1303 2167.41,1372.59 U1.37
PC7: P4.8 U1.38 | length 820.6
  Top Layer w6: P4.8 2056.06,760.06 2249,953 2249,1310 2166.72,1392.28 U1.38
PC8: P4.9 U1.39 | length 794.5
  Top Layer w6: U1.39 2169.32,1411.96 2261,1320.28 2261,892.06 P4.9
PC9: P4.10 U1.40 | length 781.1
  Top Layer w6: U1.40 2166.6,1431.65 2273,1325.25 2273,837.11 2229,793.11 P4.10
PC11: P4.12 U1.52 | length 1497.4
  Top Layer w6: U1.52 1993.43,1737.28 2036.14,1780 2268,1780 2474,1574 2474,805.06 P4.12
PC12: P4.13 U1.53 | length 1541.1
  Top Layer w6: U1.53 1973.74,1737.29 2028.45,1792 2272.97,1792 2487,1577.97 2487,802.06 P4.13
PC13: U1.2
RESET: B5.2 C15.1 D6.1 J1.15 R9.1 U1.7 | length 6605.2
  Top Layer w6: D6.1 793,374 v1(794,373) ; U1.7 1733.02,1471.02 1742.58,1480.58 1742.58,1517 1761.58,1536 1770.29,1536 ; B5.2@2815,581.06 B5.2@3070.91,581.06 ; J1.15 3180,1743.06 3180,690.15 B5.2@3070.91,581.06 ; R9.1 C15.1 3133.91,518.06 B5.2@3070.91,581.06
  Bottom Layer w6: v1(794,373) 827,340 2878,340 3070.91,532.91 B5.2@3070.91,581.06 ; v1(1783,1536) 1857,1462 1942,1462 2290,1810 2358,1810 2562,2014 2562,2260 2624,2322 2733,2322 2793,2262 2793,1909 2842,1860 3063.06,1860 J1.15
RXD: C11.3 P5.1 | length 5009.7
  Top Layer w6: C11.3 885,1069 921.06,1105.06 997,1105.06 1016,1086.06 1016,937 976.5,897.5 976.09,897.5 974.59,896 634,896 588,850 588,777 513,702 438.97,702 356,619.03 356,358 391,323 1272,323 1329,380 1329,426 1389,486 2708.03,486 2761,538.97 2761,831.54 2693.96,898.58 2580.42,898.58 2501,978 2501,1302.06 P5.1
TXD: C11.2 P5.2 | length 4578.5
  Top Layer w6: C11.2 935,965 878,908 621,908 576,863 576,788 502,714 434,714 344,624 344,349 382,311 1279,311 1341,373 1341,420 1395,474 2713,474 2773,534 2773,836.51 2698.93,910.58 2585.39,910.58 2515,980.97 2515,1216.06 P5.2
VBAT: C2.2 D1.2 D2.2 U1.1 | length 858.8
  Top Layer w20: 1693,1598.06 1620,1671.06 1620,1774.06 1680.94,1835 2078.94,1835 D1.2
VCC3.3: A1.2 A1.4 C1.1 C4.1 C5.1 C8.1 C13.1 C21.2 C22.1 D1.1 J1.1 J1.2 P1.1 P1.2 P7.1 P7.3 P7.5 Q2.1 R1.1 R2.1 R3.1 R7.1 R8.1 R9.2 R10.1 R11.1 R13.1 R16.2 R18.1 U1.19 U1.32 U1.48 U1.64 | length 11640.5
  Top Layer w12: C1.1 1757.21,1720.85 U1.64 ; U1.19 1796.57,1175.54 1821.03,1151.08 ; U1.32 2052.48,1184.01 C8.1 ; U1.48 2163.07,1589.13 C4.1@2209,1635.06
  Top Layer w15: v1(447,1133.49) R18.1 ; v1@532,443.46 v1(535,443.46) Q2.1 ; R7.1@776.5,481.56 779.94,481.56 R7.1 v1(808.02,488.99) v1@811.02,488.99 ; v1(892,414.06) R1.1 ; 1822.11,1152.15 1861.9,1152.15 1911,1103.06 C5.1 ; v1(2094.5,1100.56) C8.1 ; v1(2745,1113.06) C13.1 ; R13.1 R11.1 R10.1 R8.1 C13.1 ; J1.1 J1.2 2962,1069.06 2831.5,1069.06 C13.1 ; v1(3221.94,422.12) R9.2
  Top Layer w30: P1.1 P1.2 ; R7.1@779.94,481.56 R2.1 ; R1.1 R2.1 ; R3.1 R2.1 ; 1275,2239.06 1275,1490.06 v1(1361.06,1403.99) R16.2 1335.56,1362.56 1298,1325 1298,1174 1446,1026 1866,1026 v1@1904,1064 ; C1.1 v1(1716,1803.49) ; v1@1911,1071 C5.1 ; v1(2096,1709) 2187,1709 2209.06,1686.94 C4.1 ; v1(2128,2094) v1@2128.06,2094.06
  Top Layer w40: P7.5 1275,2239.06 1806.22,2239.06 1929.13,2116.14 2105.86,2116.14 v1(2128,2094) ; v1@2128.06,2094.06 D1.1
  Bottom Layer w30: P1.1 93.94,582.06 44,632 44,989 140,1085 398.51,1085 v1(447,1133.49) 447,1787.06 840,2180.06 P7.3 ; P1.2 396.4,582.06 v1(535,443.46) 580.53,488.99 v1(808.02,488.99) ; v1(1716,1803.49) 1716,1761 1794,1683 2064,1683 2128,1747 v1(2128,2094) ; v1(1906,1062) 2055.94,1062 v1(2094.5,1100.56) 2096.06,1099 2461,1099 2607,953 2607,726 2680,653 2885,653 3008,776 J1.2 ; J1.1 3221.94,1001.12 v1(3221.94,422.12)
VCC5: A1.3 C10.2 C11.16 C12.2 C20.1 C23.2 K1.2 K1.5 P6.1 P6.3 P6.5 | length 1287.2
  Top Layer w15: C12.2 C12.2@439.5,899.56 ; v1@562.44,899.56 v1(563,899)
  Top Layer w20: C11.16 v1(985,876)
  Top Layer w30: C12.2@439.5,899.56 C10.2 v1@562.44,899.56 ; v1(498,1481.49) C23.2
  Bottom Layer w30: v1(498,1481.49) 498,964 v1(563,899) 962,899 v1(985,876)
pads on no net: BAT1.0 C11.9 C11.10 C11.11 C11.12 C11.15 J1.11 J1.17 J1.19 K1.1 K1.6 U2.4 U2.6 U2.7 U2.8 U2.9 U2.MH1 U2.MH2 Y1. Y2. Y3.

## Polygon pours and split planes (outlines as drawn)
GND on Top Layer "Top Layer-No Net" (hatched 90Degree grid 4 track 5): 196.85,0 cw(c196.85,196.85) 0,196.85 0,2559.06 cw(c196.85,2559.05) 196.85,2755.91 3149.61,2755.91 cw(c3149.61,2559.05) 3346.46,2559.06 3346.46,196.85 cw(c3149.61,196.85) 3149.61,0
NetK1_3 on Top Layer "Top Layer-No Net" (hatched 90Degree grid 4 track 5, pour order 18): 200,1839.06 360,1839.06 360,1282.06 200,1282.06 200,1839.06
VCC5 on Top Layer "Top Layer-No Net" (hatched 90Degree grid 4 track 5, pour order 20): 22,2289.06 340,2289.06 340,1859.06 16.38,1859.06 16.38,2283.01 22,2289.06
VCC5 on Top Layer "Top Layer-No Net" (hatched 90Degree grid 4 track 5, pour order 22): 380,1899.06 580,1899.06 580,1594.4 520.48,1537.74 520.48,1502.04 397.01,1502.04 380,1518.24 380,1899.06
VCC5 on Top Layer "Top Layer-No Net" (hatched 90Degree grid 4 track 5, pour order 23): 220,1915.58 220,1859.92 219,1859.06 220,1859.92 580,1859.92 580,1911.23 571,1919.06 220,1919.06
VCC3.3 on Top Layer "Top Layer-No Net" (hatched 90Degree grid 4 track 5, pour order 24): 380,2039.06 380,1939.06 609,1939.06 620,1939.06 700,1859.06 820,1859.06 820,2039.06 380,2039.06
GND on Top Layer "Top Layer-No Net" (hatched 90Degree grid 4 track 5, pour order 25): 380,2139.06 380,2059.06 580,2059.06 640,2059.06 640,2159.06 380,2159.06 380,2139.06
VCC3.3 on Top Layer "Top Layer-No Net" (hatched 90Degree grid 4 track 5, pour order 26): 690,2159.06 690,1880.13 1038.97,1880.13 1040,1879.06 1040,2040.59 1040,2051.36 1009.12,2083.67 998.82,2094.44 998.82,2159.06 690,2159.06
GND on Top Layer "Top Layer-No Net" (hatched 90Degree grid 4 track 5, pour order 27): 890,1859.06 890,1669.06 1040,1669.06 1040,1859.06 890,1859.06
GND on Top Layer "Top Layer-No Net" (hatched 90Degree grid 4 track 5, pour order 28): 610,1779.06 610,1639.06 800,1639.06 800,1779.06 610,1779.06
VCC3.3 on Top Layer "Top Layer-No Net" (hatched 90Degree grid 4 track 5, pour order 29): 670,2293.31 670,2191.35 930,2191.35 952.5,2168.41 952.5,2071.56 999,2071.56 1000,2072.57 1000,2293.31 670,2293.31
VBAT on Top Layer "Top Layer-No Net" (hatched 90Degree grid 4 track 5, pour order 30): 2130,1989.06 2450,1989.06 2450,1902.38 2440.3,1890 2130,1890 2130,1989.06
NetBAT1_2 on Top Layer "Top Layer-No Net" (hatched 90Degree grid 4 track 5, pour order 31): 2250,2169.06 2250,2049.06 2510,2049.06 2510,2169.06 2250,2169.06
GND on Bottom Layer "Top Layer-No Net" (hatched 90Degree grid 4 track 5): 196.85,0 cw(c196.85,196.85) 0,196.85 0,2559.06 cw(c196.85,2559.05) 196.85,2755.91 3149.61,2755.91 cw(c3149.61,2559.05) 3346.46,2559.06 3346.46,196.85 cw(c3149.61,196.85) 3149.61,0
GND on Bottom Layer "Top Layer-No Net" (hatched 90Degree grid 4 track 5, pour order 19): 2212.6,1417.32 2212.6,1200.79 2448.82,1200.79 2448.82,1417.32 2212.6,1417.32
NetBAT1_2 on Bottom Layer "Top Layer-No Net" (hatched 90Degree grid 4 track 5, pour order 32): 2230,2164.06 2230,2064.06 2510,2064.06 2510,2189.06 2230,2189.06 2230,2164.06

## Keep-outs
Keep-Out Layer:
  lines w5: 3346.46,2558.5 3346.46,196.85 cw(c3149.61,196.85) 3149.61,0 196.85,0 cw(c196.85,196.85) 0,196.85 0,2559.06 cw(c196.85,2559.05) 196.85,2755.91 3149.61,2755.91 cw(c3149.61,2559.05) 3346.46,2559.06

## Other copper
Top Layer:
  rectangle net NetK1_3: 276.28,1279.06 391.83,1314.39
  rectangle net VBAT: 1646,1584.06 1733,1613.06
  pour cut-out: 1959,1137.61 1960,1136.61 1960,1012.06 1964.56,1012.06 1991,1038.5 1991,1140 1961.39,1140
  pour cut-out: 1890,1020 1895.03,1012.06 1930,1012.06 1930,1060
  pour cut-out: 1820,1140 1820,1120.06 1866.94,1120.06 1870,1123.11 1870,1140
  pour cut-out: 1295,510 1387,510 1387,439.06 1378.97,447.08 1294,447.08 1294,509
  pour cut-out: 1247,540 1270.94,516.06 1350,516.06 1350,495 1307.04,452.04 1307.03,452.06 1250,452.06 1250,533 1243,540
  pour cut-out: 2442.13,2005.92 2442.13,1903.42 2449.5,1896.06 2471.06,1896.06 2475,1900 2475,1999.27 2460,2010
  pour cut-out: 2128,2070 2130,2068 2130,1956.06 2403.06,1956.06 2427,1980 2423,1984 2423,2064.06 2135.94,2064.06 2130,2070
  pour cut-out: 1733,1613.06 1796.94,1613.06 1803,1607 1793,1597 1793,1539 1745,1539 1735,1529 1733,1531
  pour cut-out: 583,323 585,325 639,325 639,350.23 618.23,371 583,371
  pour cut-out: 356,457 493.56,457 494.5,456.06 491,452.56 491,379 353,379 359,385 359,456
  pour cut-out: 907,410 907,371 912,366 918.03,372.03 1299.11,372.03 1299.11,407.89 1292.94,414.06 909,414.06
  pour cut-out: 690,541 690,495.12 690.5,494.62 695.88,500 805,500 805,536.05 797.05,544 691,544
  pour cut-out: 271.91,1142.96 271.91,1095.09 279,1088 283,1092 550,1092 550,1120.49 527.53,1142.96
  pour cut-out: 301,2069 450,2069 447,2066 447,1910 325,1910 311,1896 301,1906
  pour cut-out: 655,2248.06 655,2108 661,2102 718.06,2159.06 979,2159.06 979,2223 949,2253 944.06,2248.06
  pour cut-out: 616,420 619,423 728,423 728,457.06 739,468.06 727.94,479.12 616,479.12
  pour cut-out: 1329,380 1323,386 1294,386 1294,447.08 1303,456.08 1311.08,448 1342,448 1342,393
  pour cut-out: 2664,732 2672,724 2672,700 2693,700 2711.5,718.5 2711,719.01 2711,739 2672,739 2663,730
  pour cut-out: 2507,1255 2532,1255 2532,1238 2524,1230 2508,1230 2508,1244 2502,1250
  pour cut-out: 1867,1316.5 2029.83,1316.5 2060,1286.33 2060,1124.06 1947,1125.61 1875,1119 1874,1303.5 1864,1313.5
  pour cut-out: 379,424.06 505.94,424.06 558,372 558,317 397,317 379,335
  pour cut-out: 728.06,479 794.5,479 795.5,478 791,473.5 791,433 730,433 730,482
  pour cut-out: 890.13,1096.06 965.94,1096.06 991,1071 979,1059 979,1047 907,1047 885,1069 891,1075 891,1096.92
  pour cut-out: 239,898 454,898 490.5,861.5 490.5,844.06 239.94,844.06 239,845 240,846 240,896.06
  pour cut-out: 2427,1666 2506,1661 2519,1636 2535.5,1626.5 2535,1619 2535,1555 2474,1555 2454,1535 2425,1564 2425,1671
  pour cut-out: 2755,1691 2760,1686 2760,1196.06 2809.49,1198.01 2857,1197 2856,1197 2859,1385.54 2857,1690 2759,1690 2754,1695
  pour cut-out: 2170,1742 2308,1742 2308,1700 2264.06,1656.06 2181.56,1656.06 2181.56,1736.44 2170,1748
  pour cut-out: 1458.56,1379.06 1587,1380 1579,1330 1573,1280.06 1570,1268.06 1567,1263 1455,1263 1455,1347.62
  pour cut-out: 2021,1132 2028.94,1124.06 2140,1124.06 2140,1095.06 2121,1076.06 2028.61,1076.06 2028.61,1123.89 2017.5,1135
  pour cut-out: 2031.58,1443 2095,1443 2095,1296.35 2115,1276.35 2104.65,1266 2007,1266 2007,1418.42
  pour cut-out: 1881,1326 1901.62,1305.38 2015,1305.38 2015,1267 1998,1250 1985,1263 1894,1263 1894,1302 1873,1323
  pour cut-out: 1761,1315 1762,1314 1819,1314 1819,1289 1809.23,1279.23 1768.16,1279.23 1768.16,1311.84 1758,1322
  pour cut-out: 1726,1397 1728,1395 1771,1395 1771,1357 1770,1358 1730,1358 1730,1392 1725,1397
  pour cut-out: 1934.37,1735.37 1934.37,1686 1997,1686 1999,1688 1993.43,1693.58 1993.43,1737.28 1936.28,1737.28
  pour cut-out: 1105,761 1208,761 1311,658 1106,658 1106,763 1105,764
  pour cut-out: 2150,1549.76 2210,1550 2280,1550 2281,1404.06 2151.06,1404.06 2151,1404
  pour cut-out: 1581,1652 1584.87,1655.87 1667,1655.87 1667,1578 1677,1568 1661,1552 1606,1552 1580,1578 1580,1653
  pour cut-out: 1577,1823 1577,1819 1608,1788 1676,1856 1611,1856 1578,1823
  pour cut-out: 1929.58,1958.56 1929.58,1915.42 1942,1903 1942.56,1903.56 1991,1903.56 1991,1954.56 1995,1958.56 1993.58,1959.98 1931,1959.98
  pour cut-out: 353,379 402,379 423,358 423,338.5 355.5,338.5 353,341
  pour cut-out: 511,482 511,378 551,338 551.5,338.5 619,338.5 619,476 613,482
  pour cut-out: 419,638 419,528.56 435,512.56 454.5,532.06 506,532.06 506,638
  pour cut-out: 655,1124.98 674.5,1105.48 680.02,1111 763,1111 763,1212 655,1212
  pour cut-out: 990,2220 990,2113 1026.44,2113 1032.5,2119.06 1032.5,2219.5 1033,2220 1032,2221 991,2221
  pour cut-out: 907,568.99 907,393.99 1229.04,393.99 1251,372.03 1259.84,380.87 1259.84,570.87 908.88,570.87
  pour cut-out: 2593.94,676 2665.65,676 2667.32,674.32 2711.5,718.5 2678.51,718.5 2657.48,739.54
  pour cut-out: 2755.91,836.64 2755.91,767.72 2744.81,767.72 2706.69,805.83 2706.69,885.85
  pour cut-out: 3100.39,541.34 3100.39,428.06 3245.87,428.06 3257.87,440.06 3257.87,544.06 3103.11,544.06
  pour cut-out: 610.69,1064.06 995.25,1064.06 1016,1043.31 1015.75,1043.06 1015.75,830.71 606.3,830.71 603,834.01 603,1066.93 610.7,1066.93 611,1067.22
  pour cut-out: 610.69,1062.99 1007.87,1062.99 1007.87,807.09 988.19,787.4 606.3,787.4 606.3,1059.67 610.69,1064.06
  pour cut-out: 615,1067.22 619.23,1062.99 1007.87,1062.99 1007.87,850.39 973.7,816.22 613.15,816.22 613.15,1065.37
  pour cut-out: 627,1067.22 627.3,1066.93 1015.75,1066.93 1015.75,862.2 1007.87,854.33 1003.94,858.27 625.98,858.27 625.98,1066.21
  pour cut-out: 1031.5,779.39 1003,750.89 976.38,777.51 976.38,900.93 1031.5,956.06
  pour cut-out: 613.15,865.75 944.34,865.75 974.59,896 999,871.59 999,750.89 607.38,750.89 602.36,755.91 613.15,766.69
  pour cut-out: 639.59,954.56 637.8,952.76 637.8,858.27 457.29,858.27 451,864.56 451,954.56
  pour cut-out: 370.08,1275.59 385.12,1260.55 459.5,1260.55 459.5,1249.16 562.99,1145.67 523.05,1105.73 287.41,1105.73 287.41,1275.59 287.4,1275.59
  pour cut-out: 185,1352.06 185,1271.84 200.79,1256.06 276.28,1256.06 276.28,1349.66 279,1352.38
  pour cut-out: 7.87,1929.13 195.06,1929.13 207,1917.2 207,1716.54 11.81,1716.54 7.87,1720.47
Bottom Layer:
  rectangle net NetBAT1_2: 2338,2060.06 2390,2131.58
  rectangle net NetBAT1_2: 2235,2064.06 2290,2129.06
  pour cut-out: 1961,1287 1961,1259.35 1993.43,1226.92 1885.5,1119 1868,1119 1827,1160 1955,1288 1960,1288
  pour cut-out: 1963,1291 1832,1160 1827,1160 1869,1118 1911,1160 1957,1160 1957,1208 1986,1237 1963,1260
  pour cut-out: 1689,848 1687,846 1687,761.58 1733.86,761.58 1760.34,788.06 1713,835.4 1713,849 1692,849 1691,848
  pour cut-out: 1379,849 1342,812 1342,763 1527.19,763 1556.25,792.06 1482.3,866 1405.44,866 1383.5,844.06
  pour cut-out: 1203,1944 1221,1926 1221,1421 1224,1421 1354,1551 1329,1576 1329,1721 1245,1805 1245,1938 1220,1938 1209,1949
  pour cut-out: 1784,1555 1783,1554 1783,1383.5 1928.5,1383.5 1953,1408 1946,1415 1946,1600 1837,1600 1791,1554
  pour cut-out: 2184,1609 2276,1609 2351,1534 2238,1421 2152,1421 2152,1573 2187,1608

## Silkscreen, mask and mechanical layers (free items; w line width, h text height)
Top Overlay:
  text "STM32F013RCT6" at 1460,2636.06 h50
Top Solder:
  text "STM32F013RCT6" at 1451,2530 h50

## Text inside footprints (layer, text, board x,y; h text height)
A1: Top Overlay "1" at 649,2097.06 h24 r270; Top Overlay "3" at 649,1917.06 h24 r270
P6: Top Overlay "GND" at 348,2332.06 h24
P7: Top Overlay "GND" at 600,2332.06 h24